# EAGLE board transceiver (EAGLE 5.06)
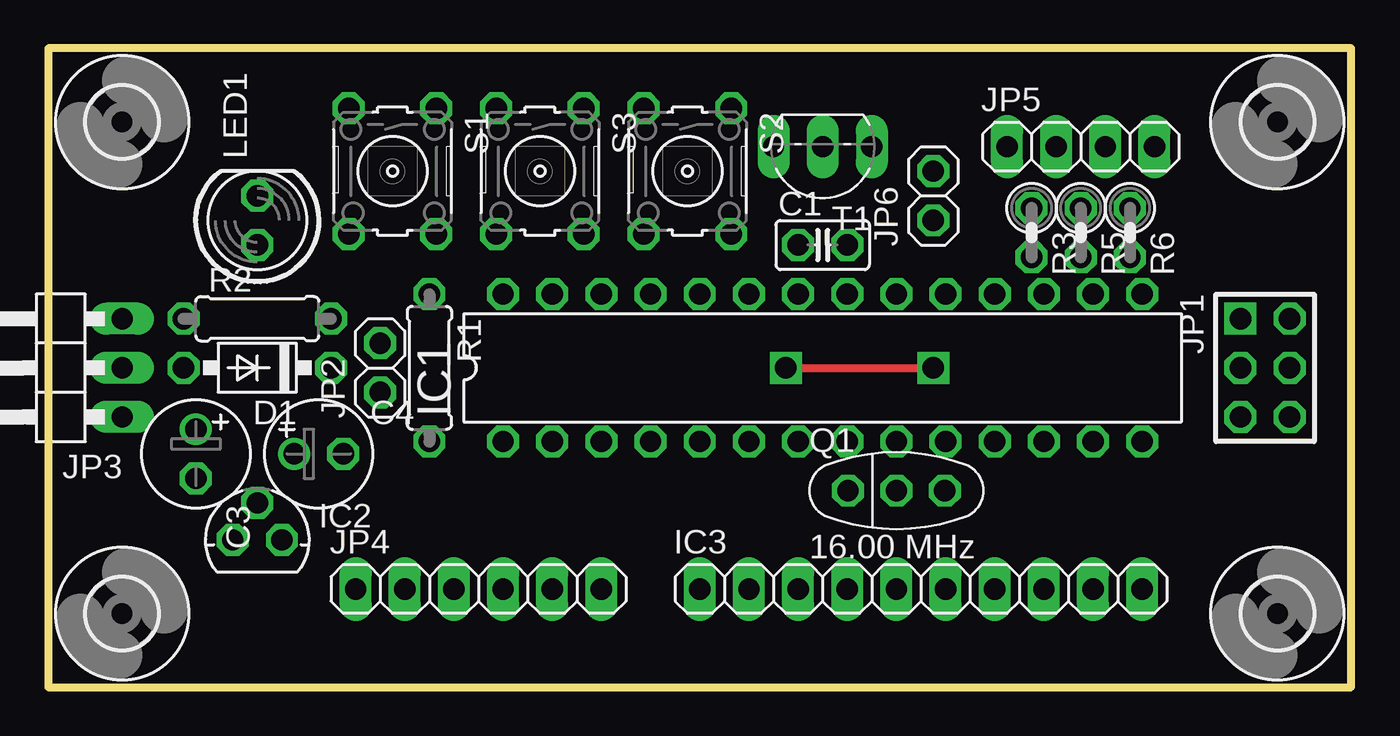
[diagram p0: board, top side]
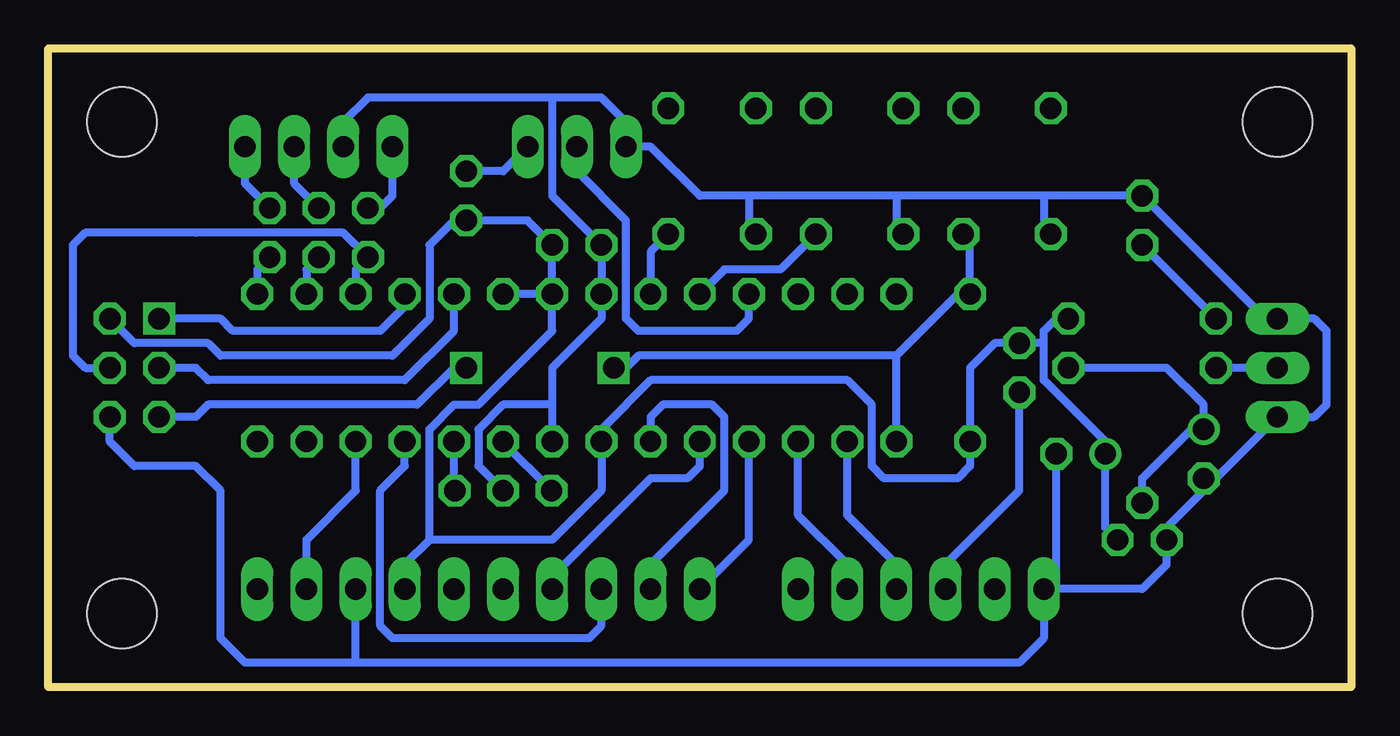
[diagram p1: board, bottom side, seen from below]

Size 67.31 x 33.02 mm. Coordinates in mm from the lower left corner, seen from the top.
Outline: 0,0 67.31,0 67.31,33.02 0,33.02 0,0
Copper layers (1*16): Top 0.035mm / dielectric 1.5mm / Bottom 0.035mm
Design rules "default": minimum track width 10mil, minimum drill 24mil, track to track 8mil, track to pad 8mil, pad to pad 8mil, via to via 8mil, smd to smd 8mil, copper to edge 40mil, drill to drill 8mil, minimum pad ring 10mil, minimum via ring 8mil, stop-mask expansion 4mil, vias tented up to drill 0mil, thermal gap 10mil

## Footprints (pad centres in the part's own frame; a part is rotated, then mirrored left to right if it is on the bottom)
C025-025X050 = drill 1.1 octagon: 1 -1.27,0; 2 1.27,0
E2,5-6 = drill 1.1 round: + -1.27,0 | drill 1.1 pad 1.6 octagon: - 1.27,0
DO41-10 = drill 1.1 octagon: A 3.81,0; C -3.81,0
DIL28-3 = drill 1.1 octagon: 1 -16.51,-3.81; 2 -13.97,-3.81; 3 -11.43,-3.81; 4 -8.89,-3.81; 5 -6.35,-3.81; 6 -3.81,-3.81; 7 -1.27,-3.81; 8 1.27,-3.81; 9 3.81,-3.81; 10 6.35,-3.81; 11 8.89,-3.81; 12 11.43,-3.81; 13 13.97,-3.81; 14 16.51,-3.81; 15 16.51,3.81; 16 13.97,3.81; 17 11.43,3.81; 18 8.89,3.81; 19 6.35,3.81; 20 3.81,3.81; 21 1.27,3.81; 22 -1.27,3.81; 23 -3.81,3.81; 24 -6.35,3.81; 25 -8.89,3.81; 26 -11.43,3.81; 27 -13.97,3.81; 28 -16.51,3.81
MCP1700-330 = drill 1.1 octagon: GND -1.27,0; IN 0,1.905; OUT 1.27,0
1X10 = drill 1.1 long: 1 -11.43,0; 2 -8.89,0; 3 -6.35,0; 4 -3.81,0; 5 -1.27,0; 6 1.27,0; 7 3.81,0; 8 6.35,0; 9 8.89,0; 10 11.43,0
AVR-ISP-6 = drill 1.1 square: 1 -2.54,-1.27 | drill 1.1 octagon: 2 -2.54,1.27; 3 0,-1.27; 4 0,1.27; 5 2.54,-1.27; 6 2.54,1.27
1X02 = drill 1.1 octagon: 1 -1.27,0; 2 1.27,0
1X03/90 = drill 1.1 long: 1 -2.54,-3.81; 2 0,-3.81; 3 2.54,-3.81
1X06 = drill 1.1 long: 1 -6.35,0; 2 -3.81,0; 3 -1.27,0; 4 1.27,0; 5 3.81,0; 6 6.35,0
1X04 = drill 1.1 long: 1 -3.81,0; 2 -1.27,0; 3 1.27,0; 4 3.81,0
LED5MM = drill 1.1 octagon: A -1.27,0; K 1.27,0
CSTLS_G9 = drill 1.1 octagon: 1 -2.5,0; 2 0,0; 3 2.5,0
0207/7 = drill 1.1 octagon: 1 -3.81,0; 2 3.81,0
0207/2V = drill 1.1 octagon: 1 -1.27,0; 2 1.27,0
B3F-10XX = drill 1.1 octagon: 1 -3.251,2.261; 2 3.251,2.261; 3 -3.251,-2.261; 4 3.251,-2.261
TO92- = drill 1.1 long: 1 2.54,0; 2 0,0; 3 -2.54,0
3,6 = hole 3.6: 0,0

## Placement (x,y rotation side)
C1  0.1uF  [C025-025X050]  40.01,22.86 0 top
C3  10uF/25V  [E2,5-6]  7.62,12.06 270 top
C4  100uF/16V  [E2,5-6]  13.97,12.06 0 top
D1  1N4001  [DO41-10]  10.79,16.51 180 top
IC1  MEGA8-P  [DIL28-3]  40.01,16.51 0 top
IC2  [MCP1700-330]  10.79,7.62 0 top
IC3  RF-24G  [1X10]  45.09,5.08 0 top
JP1  AVR-ISP-6  [AVR-ISP-6]  62.87,16.51 270 top
JP2  [1X02]  17.14,16.51 90 top
JP3  [1X03/90]  0,16.51 90 top
JP4  [1X06]  22.23,5.08 0 top
JP5  [1X04]  53.34,27.94 0 top
JP6  [1X02]  45.72,25.4 90 top
LED1  [LED5MM]  10.79,24.13 90 top
Q1  16.00 MHz  [CSTLS_G9]  43.81,10.16 0 top
R1  10K  [0207/7]  19.68,16.51 270 top
R2  1 K  [0207/7]  10.79,19.05 0 top
R3  330  [0207/2V]  50.8,23.5 270 top
R5  330  [0207/2V]  53.34,23.5 270 top
R6  330  [0207/2V]  55.88,23.5 270 top
S1  [B3F-10XX]  17.78,26.67 270 top
S2  [B3F-10XX]  33.02,26.67 270 top
S3  [B3F-10XX]  25.4,26.67 270 top
T1  BC547  [TO92-]  40.01,27.94 180 top
U$1  [3,6]  3.81,29.21 0 top
U$2  [3,6]  3.81,3.81 0 top
U$3  [3,6]  63.5,29.21 0 top
U$4  [3,6]  63.5,3.81 0 top

## Library data of the parts
C1 C3 C4 IC1 JP1 Q1 S1-S3 = ccard
D1 IC2 JP2-JP6 LED1 R1-R3 R5 R6 T1 U$1-U$4 = transceptor
IC3 = RF-24G

## Nets
+3V3: C1.2 C4.+ IC1.7 IC1.20 IC1.21 IC2.OUT IC3.7 JP1.2 JP2.2 JP6.1 R1.2 R2.2
BLUE: IC1.15 R6.2
CE: IC1.12 IC3.9
CLK1: IC1.6 IC3.2
CS: IC1.4 IC3.1
DATA: IC1.11 IC3.3
DR1: IC1.5 IC3.4
GND: C1.1 C3.- C4.- IC1.8 IC1.22 IC2.GND IC3.8 JP1.6 JP3.1 JP3.3 JP4.1 JP5.2 LED1.K Q1.2 S1.4 S2.4 S3.4 T1.1
GREEN: IC1.16 R5.2
MISO: IC1.18 JP1.1
MOSI/RED: IC1.17 JP1.4 R3.2
N$1: D1.A JP3.2
N$2: IC1.23 S2.2
N$3: IC1.24 S3.2
N$4: JP6.2 T1.3
N$5: IC1.10 Q1.3
N$6: IC1.9 Q1.1
N$7: JP5.4 R6.1
N$8: JP5.3 R5.1
N$9: JP5.1 R3.1
N$16: LED1.A R2.1
N$23: C3.+ D1.C IC2.IN
RST: IC1.1 JP1.5 R1.1 S1.2
RXD: IC1.2 JP4.4
SCK: IC1.19 JP1.3
TRANS: IC1.25 T1.2
TXD: IC1.3 JP4.5
USB_5V: JP2.1 JP4.3

## Tracks (layer width: path | path; a pad name or v marks a point on that pad's centre or on a via)
+3V3
  Bottom 0.406: IC2.OUT 12.7,8.26 C4.+ 12.7,12.7 15.88,15.88 15.88,17.78 | R2.2 15.24,19.05 15.88,18.41 15.88,17.78 | 15.88,17.78 JP2.2 18.41,17.78 19.68,16.51 R1.2 19.68,11.43 20.32,10.79 24.13,10.79 24.77,11.43 24.77,14.61 26.04,15.88 36.2,15.88 38.73,13.34 IC1.7 38.73,10.16 41.27,7.62 47.62,7.62 | IC1.21 IC1.20 | IC1.21 C1.2 42.55,24.13 JP6.1 46.35,24.13 47.62,22.86 47.62,19.05 49.53,17.14 58.42,17.14 59.05,17.78 62.87,17.78 JP1.2 | IC3.7 48.9,6.35 47.62,7.62 | IC1.21 41.27,18.41 45.09,14.61 46.35,14.61 47.62,13.34 47.62,7.62
BLUE
  Bottom 0.406: IC1.15 56.52,21.59 R6.2
CE
  Bottom 0.406: IC1.12 51.44,10.16 53.98,7.62 IC3.9
CLK1
  Bottom 0.406: IC3.2 36.2,6.35 32.38,10.16 32.38,13.97 33.02,14.61 35.56,14.61 36.2,13.97 IC1.6
CS
  Bottom 0.406: IC1.4 31.11,7.62 IC3.1
DATA
  Bottom 0.406: IC3.3 38.73,3.17 39.37,2.54 49.53,2.54 50.16,3.17 50.16,10.16 48.9,11.43 IC1.11
DR1
  Bottom 0.406: IC3.4 41.27,5.71 36.2,10.79 34.29,10.79 33.66,11.43 IC1.5
GND
  Bottom 0.406: 15.88,25.4 LED1.K 4.45,19.05 JP3.3 1.91,19.05 1.27,18.41 1.27,14.61 1.91,13.97 JP3.1 6.99,10.79 C3.- 7.62,10.16 9.53,8.26 IC2.GND 9.53,6.35 10.79,5.08 15.24,5.08 | 15.88,25.4 23.5,25.4 | S1.4 15.88,23.7 15.88,25.4 | S3.4 23.5,23.7 23.5,25.4 | 23.5,25.4 31.11,25.4 | S2.4 31.11,23.7 31.11,25.4 | 15.24,5.08 JP4.1 15.88,2.54 17.14,1.27 51.44,1.27 | 51.44,1.27 IC3.8 | 31.11,25.4 33.66,25.4 36.2,27.94 T1.1 37.47,29.21 38.73,30.48 41.27,30.48 | JP5.2 52.07,29.21 50.8,30.48 41.27,30.48 | Q1.2 45.09,11.43 45.09,13.34 43.81,14.61 41.27,14.61 | 41.27,30.48 41.27,25.4 C1.1 IC1.22 38.73,19.05 41.27,16.51 41.27,14.61 | 41.27,14.61 IC1.8 | 51.44,1.27 57.15,1.27 58.42,2.54 58.42,10.16 59.69,11.43 62.87,11.43 64.14,12.7 JP1.6 | 15.24,5.08 C4.-
GREEN
  Bottom 0.406: IC1.16 53.98,21.59 R5.2
MISO
  Bottom 0.406: JP1.1 58.42,19.05 57.78,18.41 50.16,18.41 48.9,19.68 IC1.18
MOSI/RED
  Bottom 0.406: JP1.4 65.41,16.51 66.04,17.14 66.04,22.86 65.41,23.5 59.69,23.5 52.07,23.5 R3.2 51.44,21.59 IC1.17
N$1
  Bottom 0.406: JP3.2 D1.A
N$2
  Bottom 0.406: IC1.23 36.2,22.5 S2.2
N$3
  Bottom 0.406: IC1.24 32.38,21.59 29.49,21.59 S3.2
N$4
  Bottom 0.406: T1.3 43.81,26.67 JP6.2
N$5
  Bottom 0.406: Q1.3 46.35,11.39 IC1.10
N$6
  Bottom 0.406: Q1.1 43.81,12.66 IC1.9
N$7
  Bottom 0.406: R6.1 57.15,26.04 JP5.4
N$8
  Bottom 0.406: R5.1 54.61,26.04 JP5.3
N$9
  Bottom 0.406: R3.1 50.16,24.77 49.53,25.4 JP5.1
N$16
  Bottom 0.406: R2.1 LED1.A
N$23
  Bottom 0.406: D1.C 9.53,16.51 7.62,14.61 C3.+ 8.26,13.34 10.79,10.79 IC2.IN
RST  (via drill 1.1)
  Top 0.406: v38.1,16.51 v45.72,16.51
  Bottom 0.406: S1.2 19.68,23.06 R1.1 20.32,20.32 23.5,17.14 | JP1.5 59.69,13.97 59.05,14.61 48.26,14.61 46.35,16.51 v45.72,16.51 | v38.1,16.51 37.47,16.51 36.83,17.14 23.5,17.14 | IC1.1 23.5,17.14
RXD
  Bottom 0.406: JP4.4 23.5,6.35 26.04,8.89 IC1.2
SCK
  Bottom 0.406: IC1.19 46.35,18.41 48.9,15.88 59.05,15.88 59.69,16.51 JP1.3
TRANS
  Bottom 0.406: T1.2 40.01,26.67 37.47,24.13 37.47,19.05 36.83,18.41 31.75,18.41 31.11,19.05 IC1.25
TXD
  Bottom 0.406: JP4.5 26.04,6.35 28.57,8.89 IC1.3
USB_5V
  Bottom 0.406: JP2.1 17.14,10.16 20.95,6.35 JP4.3